# Altium PCB GPS_tracker PCB.PcbDoc (part 2 of 2)
Units mm, origin at the board's own origin, x right, y up, seen from the top; angles counter-clockwise.
Board outline 70 x 70 mm, 2 copper layers (Top Layer, Bottom Layer), stack 1.57 mm thick; 71 components, 56 nets, 304 pads, 132 vias.
Unrouted connection lines stored in the file: 4.
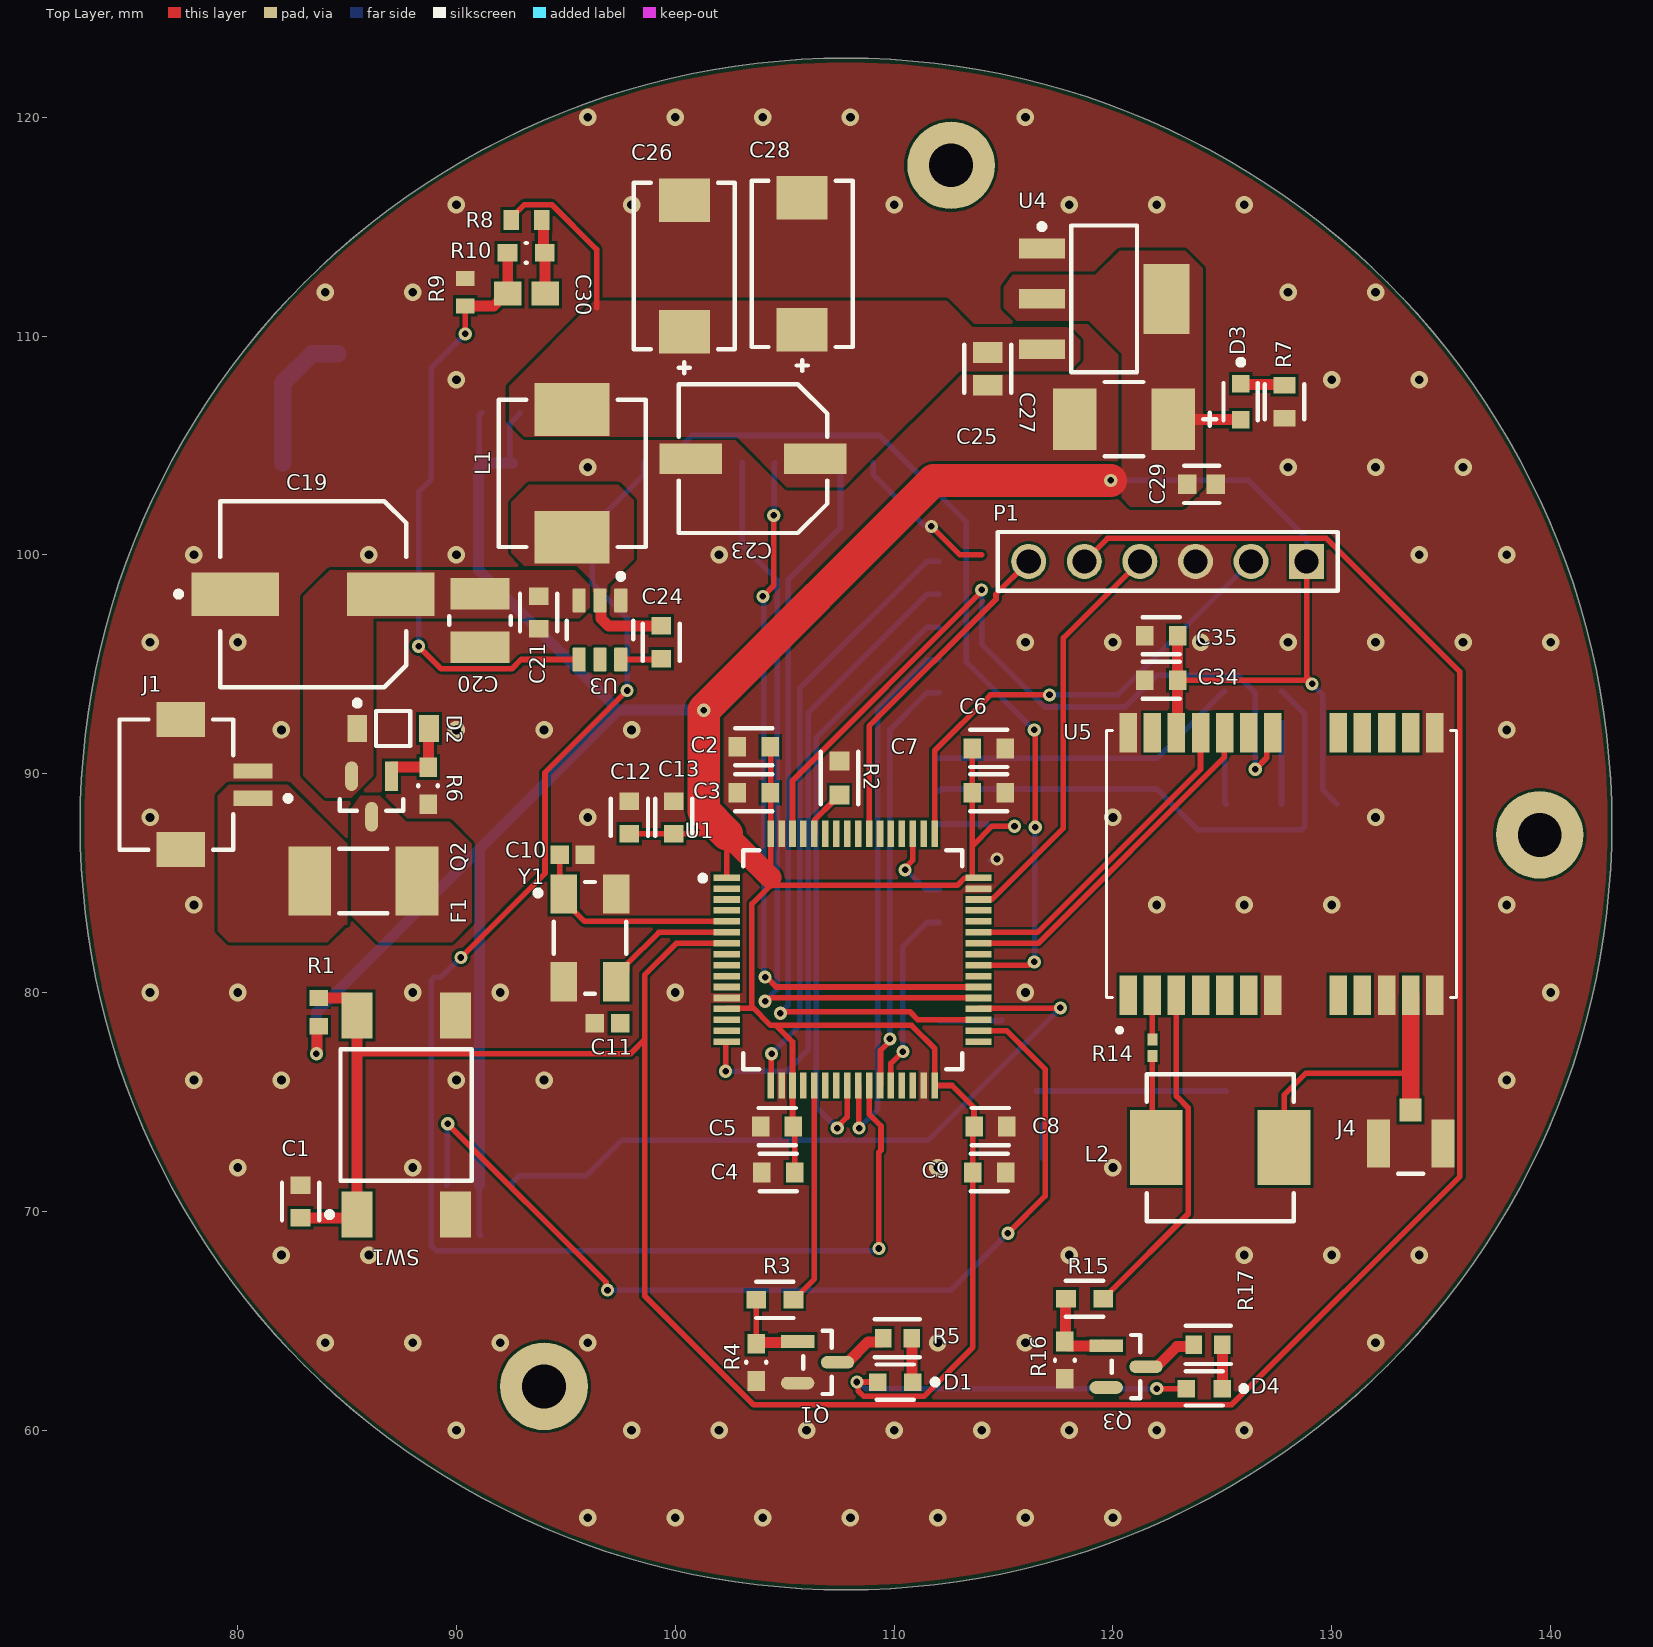
[diagram p0: Top Layer view]

## Via types
v1: diameter 0.8, hole 0.4, Top Layer to Bottom Layer, tented both sides, 96 vias
v2: diameter 0.6, hole 0.3, Top Layer to Bottom Layer, tented both sides, 36 vias

## Nets (pads, with @x,y where several pads share a name; then routed paths per layer and width w, separated by ;. In a path a pad name is that pad's centre, name@x,y a point inside that pad or via, vN(x,y) a via of type N, cw(c..) or ccw(c..) an arc to the next point about the centre after c; other vN are vias at no path point) (continued)
3.3V: (continued)
  Top Layer w1.5: 102.355,87.245 101.3,88.3 v2(101.3,92.9) 111.8,103.4 v2(119.9,103.4)
  Bottom Layer w0.254: U2.38@91,103.9 91.05,103.95 U2.38 91.05,106.4 C17.1 ; U2.28 91.05,68.95 C14.1 ; U2.39 92.426,104.324 92.426,105.976 92.9,106.45 C15.1 ; v2(108.3,62.2) 108.394,62.2 108.694,61.9 v2(122,61.9) ; U2.15 114.877,78.7 C18.1 ; U2.9 114.25,87.7 C16.1 114.45,87.6 v2(115.5,87.6) ; v2(119.9,103.4) 126.2,103.4 128.85,100.75 P1.1 ; v2(129.1,94.1) 129.1,94.091 129.577,93.614 129.577,89.273 J2.1
  Bottom Layer w0.5: v2(83.6,77.2) 83.6,79.1 91.05,86.55 ; U2.38@91,103.9 91,99.3 97.4,92.9 ; U2.28 91.05,86.55 ; U2.38 U2.39 ; v2(101.3,92.9) 97.4,92.9 ; 91.05,86.55 97.4,92.9
5V: C23.1 C25.1 C26.2 C28.2 L1.2 R8.2 U4.3 | length 7.8
  Top Layer w0.254: R8.2 92.5,115.402 93.104,116.006 94.355,116.006 96.4,113.961 96.4,111.3
BOOT0: R2.2 U1.60 | length 2.3
  Top Layer w0.254: U1.60 106.378,87.273 106.378,87.901 107.171,88.694 107.171,88.721 107.473,89.023 R2.2
GND: C1.1 C2.2 C3.2 C4.2 C5.2 C6.2 C7.2 C8.2 C9.2 C10.1 C11.1 C12.2 C13.2 C14.2 C15.2 C16.2 C17.2 C18.2 C19.1 C20.2 C21.2 C23.2 C25.2 C26.1 C27.1 C28.1 C29.2 C31.2 C34.2 C35.2 J1.2 J1.3 J1.4 J2.4 J2.Shiled J3.2 J3.3 J4.2 J4.3 P1.3 Q1.2 R2.1 R4.1 R6.1 R7.1 R9.1 R16.1 SW1.3 SW1.4 U1.12 U1.18 U1.31 U1.47 U1.63 U2.17 U2.30 U2.31 U2.32 U2.34 U2.35 U2.36 U2.37 U2.48 U3.1 U4.1 U5.7 U5.10 U5.12 U5.13 U5.24 Y1.2 Y1.4 | length 7.3
  Top Layer w0.254: v2(111.7,101.3) 113,100 114,100
  Bottom Layer w0.254: U2.48 109.05,103.65 111.334,101.366 111.634,101.366 v2(111.7,101.3) ; C16.2 114.65,86.05 v2(114.7,86.1)
  other v1: 96,56 100,56 104,56 108,56 112,56 116,56 120,56 90,60 98,60 102,60 106,60 110,60 114,60 118,60 122,60 126,60 84,64 88,64 92,64 96,64 112,64 116,64 132,64 82,68 86,68 118,68 126,68 130,68 134,68 80,72 88,72 112,72 120,72 78,76 82,76 90,76 94,76 138,76 76,80 80,80 88,80 92,80 100,80 116,80 140,80 78,84 122,84 126,84 130,84 138,84 76,88 96,88 120,88 132,88 82,92 90,92 94,92 98,92 138,92 76,96 80,96 116,96 120,96 124,96 128,96 132,96 136,96 140,96 78,100 86,100 90,100 102,100 134,100 138,100 96,104 128,104 132,104 136,104 90,108 130,108 134,108 84,112 88,112 128,112 132,112 90,116 98,116 110,116 118,116 122,116 126,116 96,120 100,120 104,120 108,120 116,120
LED_G: R15.1 U5.3 | length 15.7
  Top Layer w0.254: R15.1 119.6,66 119.873,66.273 119.873,66.323 123.439,69.889 123.439,74.73 122.9,75.27 U5.3
LED_R: R3.1 U1.21 | length 10.2
  Top Layer w0.254: R3.1 105.45,65.952 105.723,66.225 105.723,66.275 106.355,66.907 U1.21
N\R\S\T\: C1.2 P1.5 R1.2 SW1.1 SW1.2 U1.7 | length 133.3
  Top Layer w0.254: 85.452,77.2 97.951,77.2 98.6,77.849 ; U1.7 100.05,82.25 98.6,80.8 98.6,77.849 ; P1.5 119.744,100.754 129.755,100.754 135.854,94.655 135.854,71.595 125.422,61.163 103.578,61.163 98.6,66.141 98.6,77.849
  Top Layer w0.5: C1.2 85.302,69.7 SW1.1 85.452,77.2 SW1.2 85.452,79.3 85.002,79.75 R1.2
NetC19_2: C19.2 C20.1 C21.1 D2.1 Q2.2 U3.3
NetC24_1: C24.1 U3.6 | length 1.9
  Top Layer w0.254: U3.6 99.325,95.216 C24.1
NetC24_2: C24.2 L1.1 U3.2 | length 3.7
  Top Layer w0.5: U3.2 96.607,97.866 96.607,97.093 96.95,96.75 C24.2
NetC30_1: C30.1 R9.2 R10.1 U3.4 | length 28.4
  Top Layer w0.254: v2(88.267,95.822) 89.295,94.794 92.535,94.794 92.956,95.216 U3.4 ; v2(90.4,110.1) R9.2
  Top Layer w0.5: R9.2 91.702,111.375 92.275,111.948 C30.1 92.342,111.955 92.342,113.792 R10.1
  Bottom Layer w0.254: v2(88.267,95.822) 88.267,102.872 88.846,103.45 88.846,108.546 v2(90.4,110.1)
NetC30_2: C30.2 R8.1 R10.2 | length 3.4
  Top Layer w0.5: R8.1 93.967,115.235 93.967,113.867 R10.2 94.042,113.792 94.042,111.955 C30.2
NetD1_1: D1.1 R5.1 | length 2
  Top Layer w0.5: R5.1 110.825,64.175 110.825,62.223 D1.1
NetD2_2: D2.2 Q2.1 R6.2 | length 3.8
  Top Layer w0.5: Q2.1 87.038,90.257 87.081,90.3 R6.2 88.718,90.318 88.718,92.047 D2.2
NetD3_1: D3.1 R7.2 | length 2
  Top Layer w0.5: D3.1 125.877,107.787 127.804,107.787 R7.2
NetD4_1: D4.1 R17.1 | length 2
  Top Layer w0.5: D4.1@125,61.9 R17.1
NetF1_1: F1.1 J1.1
NetF1_2: F1.2 Q2.3
NetJ2_2: J2.2 R11.2 | length 3.7
  Bottom Layer w0.254: R11.2 127.7,88.61 J2.2
NetJ2_3: J2.3 R12.2 | length 3.8
  Bottom Layer w0.254: R12.2 125.1,88.67 J2.3
NetJ2_6: J2.6 R13.2 | length 8.7
  Bottom Layer w0.254: R13.2@116.492,75.5 J2.6
NetJ3_1: J3.1 U2.33 | length 6.7
  Bottom Layer w0.8: U2.33 82.05,107.85 83.4,109.2 J3.1
NetJ4_1: J4.1 L2.1 U5.11 | length 13.8
  Top Layer w0.254: L2.1 127.821,75.321 128.8,76.3 133.6,76.3
  Top Layer w0.8: J4.1 133.6,76.3 U5.11
NetL2_2: L2.2 R14.1 | length 4.3
  Top Layer w0.254: R14.1 121.8,73.09 L2.2
NetQ1_1: Q1.1 R3.2 R4.2 | length 3.9
  Top Layer w0.254: R4.2 R3.2
  Top Layer w0.5: R4.2 103.761,64.011 Q1.1@105.551,64.011
NetQ1_3: Q1.3 R5.2 | length 2.6
  Top Layer w0.5: Q1.3 107.862,63.1 108.795,64.033 109.37,64.033 109.498,64.161 R5.2
NetQ3_1: Q3.1 R15.2 R16.2 | length 4
  Top Layer w0.5: R15.2 117.825,65.975 117.825,64.025 117.8,64 117.95,63.85 Q3.1@119.589,63.85 ; Q3.1@119.55,63.889 Q3.1@119.589,63.85 ; Q3.1 Q3.1@119.589,63.85
NetQ3_3: Q3.3 R17.2 | length 2.6
  Top Layer w0.5: Q3.3 122,62.9 122.914,63.814 123.612,63.814 R17.2
NetU1_16: U1.16 U2.2 | length 29.2
  Top Layer w0.254: v2(102.3,76.4) 102.3,77.727 102.323,77.75 U1.16
  Bottom Layer w0.254: v2(102.3,76.4) 105.1,76.4 106.065,77.365 106.065,92.765 111.5,98.2 U2.2
NetU1_17: U1.17 U2.1 | length 27.5
  Top Layer w0.254: U1.17 104.377,75.773 104.377,77.177 v2(104.4,77.2)
  Bottom Layer w0.254: v2(104.4,77.2) 105.684,78.484 105.684,93.884 111.5,99.7 U2.1
NetU1_24: U1.24 U2.3 | length 28.1
  Top Layer w0.254: v2(107.4,73.8) 107.4,73.854 107.855,74.309 U1.24
  Bottom Layer w0.254: v2(107.4,73.8) 106.446,74.754 106.446,91.646 111.5,96.7 U2.3
NetU1_26: U1.26 U2.41 | length 69.6
  Top Layer w0.254: v2(90.2,81.6) 94.046,85.446 94.046,90.046 v2(97.8,93.8) ; U1.26 108.855,74.445 109.4,73.9 109.4,72.8 109.3,72.7 v2(109.3,68.3)
  Bottom Layer w0.254: v2(90.2,81.6) 89.3,80.7 89,80.7 88.846,80.546 88.846,68.445 89.095,68.196 109.102,68.196 109.206,68.3 v2(109.3,68.3) ; v2(97.8,93.8) 97.8,97.101 96.214,98.687 96.214,101.314 98.55,103.65 U2.41
NetU1_27: U1.27 U2.5 | length 19.4
  Top Layer w0.254: U1.27 109.378,75.773 109.378,77.357 109.808,77.787 v2(109.808,77.881)
  Bottom Layer w0.254: v2(109.808,77.881) 109.808,92.008 111.5,93.7 U2.5
NetU1_28: U1.28 U2.12 | length 8.7
  Top Layer w0.254: U1.28 109.855,76.755 v2(110.4,77.3)
  Bottom Layer w0.254: v2(110.4,77.3) 110.4,82.1 111.5,83.2 U2.12
NetU1_34: U1.34 U2.29 | length 44.8
  Top Layer w0.254: v2(89.6,74) 96.834,66.766 96.834,66.466 v2(96.9,66.4) ; U1.34 115.15,78.25 116.9,76.5 116.9,70.7 v2(115.2,69)
  Bottom Layer w0.254: U2.29 89.575,71.225 89.575,73.975 v2(89.6,74) ; v2(96.9,66.4) 112.6,66.4 v2(115.2,69)
NetU1_35: U1.35 U2.47 | length 35.5
  Top Layer w0.254: v2(104.8,79.054) 104.866,79.12 110.719,79.12 111.089,78.75 U1.35
  Bottom Layer w0.254: v2(104.8,79.054) 105.154,79.408 105.154,98.854 107.55,101.25 U2.47
NetU1_36: U1.36 U2.27 | length 32.2
  Top Layer w0.254: U1.36 113.878,79.273 117.573,79.273 v2(117.6,79.3)
  Bottom Layer w0.254: U2.27 92.55,71.325 92.848,71.623 95.927,71.623 97.55,73.246 111.546,73.246 v2(117.6,79.3)
NetU1_38: U1.38 U2.45 | length 33.7
  Top Layer w0.254: v2(104,98.1) 104.5,98.6 v2(104.5,101.8) ; v2(104.1,80.7) 104.163,80.7 104.613,80.25 U1.38
  Bottom Layer w0.254: v2(104,98.1) 104.05,98.05 104.05,80.75 v2(104.1,80.7) ; v2(104.5,101.8) 104.525,101.825 104.525,104.175 U2.45
OSC_IN: C10.2 U1.5 Y1.1 | length 10
  Top Layer w0.254: C10.2 94.725,84.675 Y1.1 94.9,84.2 95.85,83.25 U1.5
OSC_OUT: C11.2 U1.6 Y1.3 | length 6.2
  Top Layer w0.254: Y1.3 97.773,80.973 97.773,81.273 99.25,82.75 U1.6
SCL: U1.61
SDA: U1.62 U5.18 | length 37.3
  Top Layer w0.254: U1.62 105.355,89.676 114,98.321 v2(114,98.4) ; v2(126.5,90.2) 127.027,90.727 127.027,91.602 U5.18
  Bottom Layer w0.254: v2(114,98.4) 114,95.917 116.871,93.046 120.553,93.046 122.004,94.497 125.686,94.497 126.5,93.683 v2(126.5,90.2)
SIM_CLK: R12.1 U2.7 | length 14.3
  Bottom Layer w0.254: U2.7 122.011,90.7 125.086,93.776 R12.1
SIM_DATA: C31.1 R13.1 | length 1.5
  Bottom Layer w0.254: R13.1 116.798,72.439 C31.1
SIM_RST: R11.1 U2.8 | length 24.2
  Bottom Layer w0.254: U2.8 112.15,89.3 122,89.3 123.854,87.446 128.615,87.446 128.764,87.595 128.764,92.725 127.714,93.776 R11.1
SWCLK: P1.2 U1.49 | length 21.8
  Top Layer w0.254: U1.49 111.855,91.055 114.4,93.6 v2(117.1,93.6)
  Bottom Layer w0.254: v2(117.1,93.6) 120.21,93.6 P1.2
SWDIO: P1.4 U1.46 | length 18.9
  Top Layer w0.254: U1.46 113.878,84.273 114.487,84.273 117.73,87.516 117.73,96.2 P1.4
SWO: P1.6 U1.55 | length 15.5
  Top Layer w0.254: U1.55 108.855,92.171 114.654,97.971 114.654,98.204 P1.6
UART1_RX: U1.43 U5.21 | length 14.9
  Top Layer w0.254: U1.43 116.55,82.75 124,90.2 U5.21
UART1_TX: U1.42 U5.20 | length 15.9
  Top Layer w0.254: U1.42 116.589,82.25 125.082,90.743 125.082,91.857 U5.20
UART3_DCD: U1.40 U2.42 | length 39.8
  Top Layer w0.254: U1.40 116.156,81.25 116.306,81.4 v2(116.4,81.4) ; v2(116.4,92) 116.45,91.95 v2(116.45,87.55)
  Bottom Layer w0.254: U2.42 100.05,104.75 100.754,105.454 109.342,105.454 113.304,101.492 113.304,95.096 v2(116.4,92) ; v2(116.4,81.4) 116.425,81.425 116.425,87.525 v2(116.45,87.55)
UART3_DTR: U1.52
UART3_RI: U1.51 U2.11 | length 3.7
  Top Layer w0.254: v2(110.5,85.6) 110.5,85.694 110.855,86.048 U1.51
  Bottom Layer w0.254: v2(110.5,85.6) 110.55,85.6 111.45,84.7 U2.11
UART3_RTS: U1.37 U2.44 | length 35.3
  Top Layer w0.254: v2(104.1,79.6) 104.194,79.6 104.344,79.75 U1.37
  Bottom Layer w0.254: U2.44 103.05,100.45 104.654,98.846 104.654,80.154 v2(104.1,79.6)
UART3_TX: U1.25 U2.4 | length 25.2
  Top Layer w0.254: U1.25 108.377,75.727 108.377,73.823 v2(108.4,73.8)
  Bottom Layer w0.254: v2(108.4,73.8) 109.254,74.654 109.254,92.954 111.5,95.2 U2.4
VCC_RF: R14.2 U5.2 | length 2
  Top Layer w0.254: R14.2 U5.2
pads on no net: J2.5 Q3.2 U1.2 U1.3 U1.4 U1.8 U1.9 U1.10 U1.11 U1.14 U1.15 U1.20 U1.22 U1.23 U1.29 U1.30 U1.33 U1.39 U1.41 U1.44 U1.45 U1.50 U1.53 U1.54 U1.56 U1.57 U1.58 U1.59 U2.6 U2.10 U2.13 U2.14 U2.16 U2.18 U2.19 U2.20 U2.21 U2.22 U2.23 U2.24 U2.25 U2.26 U2.40 U2.43 U2.46 U3.5 U5.1 U5.4 U5.5 U5.6 U5.8 U5.9 U5.14 U5.15 U5.16 U5.17 U5.19

## Polygon pours and split planes (outlines as drawn)
GND on Top Layer "GND_L01_P010" (solid, pour order 10): 144.9,125.3 144.8,125.4 71,125.4 71,50.8 70.9,50.7 144.9,50.7
NetC24_2 on Top Layer "NETC24_2_L01_P005" (solid, pour order 5): 96.2,97.3 96.2,98.8 95.5,99.5 93.1,99.5 92.5,100.1 92.5,102.4 93.3,103.2 97.4,103.2 98.1,102.5 98.1,99.8 96.9,98.6 96.9,97.3
3.3V on Top Layer "3.3V_L01_P007" (solid, pour order 7): 115.425,112.8 119.2,112.8 120.3,113.9 123.3,113.9 124.1,113.1 124.1,103.1 123.2,102.2 120.8,102.2 120.4,102.6 120.4,109.2 118.9,110.7 115.6,110.7 115,111.3 115,112.233
NetC19_2 on Top Layer "NETC19_2_L01_P008" (solid, pour order 8): 83,89.9 84,88.9 85.2,88.9 86.2,89.9 86.2,97.9 84.8,99.3 84.2,99.3 83,98.1
5V on Top Layer "5V_L01_P006" (solid, pour order 6): 93.1,105.4 92.4,106.1 92.4,107.7 96.3,111.6 112.4,111.6 113.6,110.4 117.9,110.4 118.5,109.8 118.5,108.9 118,108.4 113,108.4 108.5,103.9 107.7,103.1 105.1,103.1 102.8,105.4
NetC19_2 on Top Layer "NETC19_2_L01_P004" (solid, pour order 4): 83.5,98.6 84.2,99.3 95.4,99.3 96.1,98.6 96.1,97.6 95.6,97.1 84.1,97.1 83.5,97.7
NetF1_2 on Top Layer "NETF1_2_L01_P001" (solid, pour order 1): 85.2,88.4 85.2,83.5 86.4,82.3 89.8,82.3 90.7,83.2 90.7,86.8 89.7,87.8 87.7,87.8 86.5,89 85.6,89
NetF1_1 on Top Layer "NETF1_1_L01_P000" (solid, pour order 0): 79.1,89 79.6,89.5 82.3,89.5 85,86.8 85,83.1 84.9,83.1 84.1,82.3 79.6,82.3 79.1,82.8
GND on Bottom Layer "GND_L02_P009" (solid, pour order 9): 144.9,125.3 144.8,125.4 71,125.4 71,50.8 70.9,50.7 144.9,50.7

## Silkscreen, mask and mechanical layers (free items; w line width, h text height)
Board Shape:
  circle w0.254: c107.8,87.7 r35

## Text inside footprints (layer, text, board x,y; h text height)
J2: Mechanical 2 "Via Limited Area" at 127.35,77.55 h0.7 r270